# EAGLE board tarjeta-v9 (EAGLE 7.6.0)
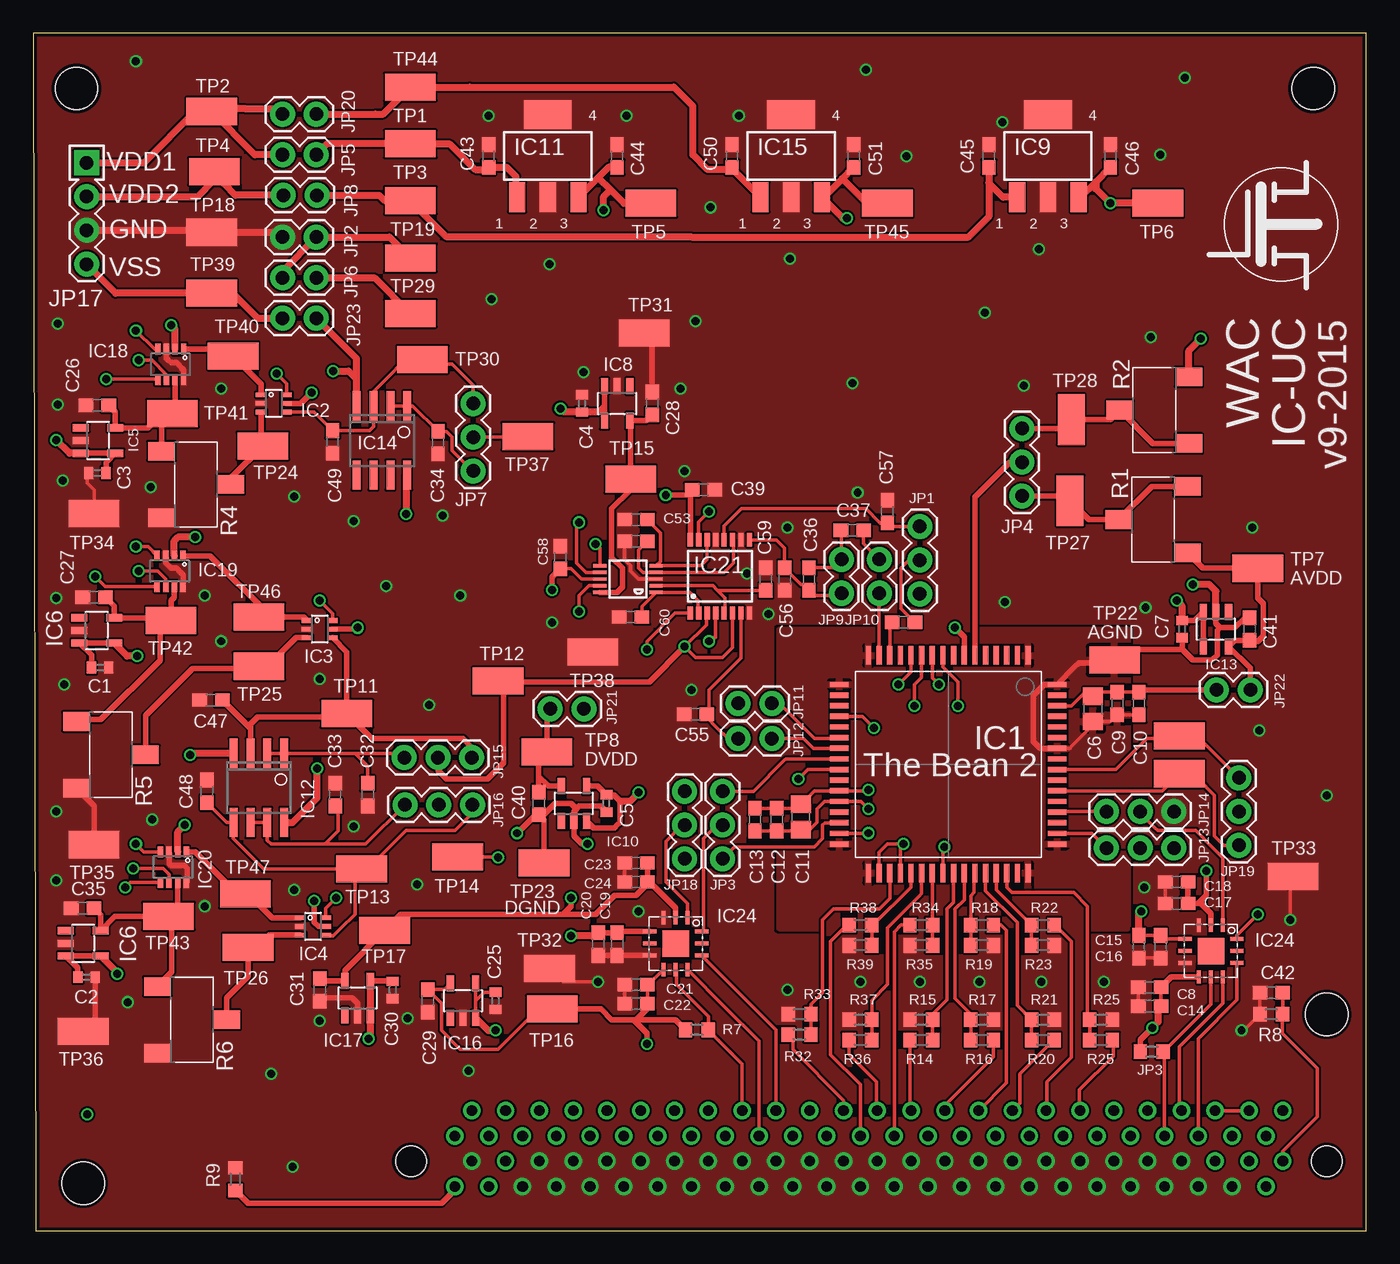
[diagram p0: board, top side]
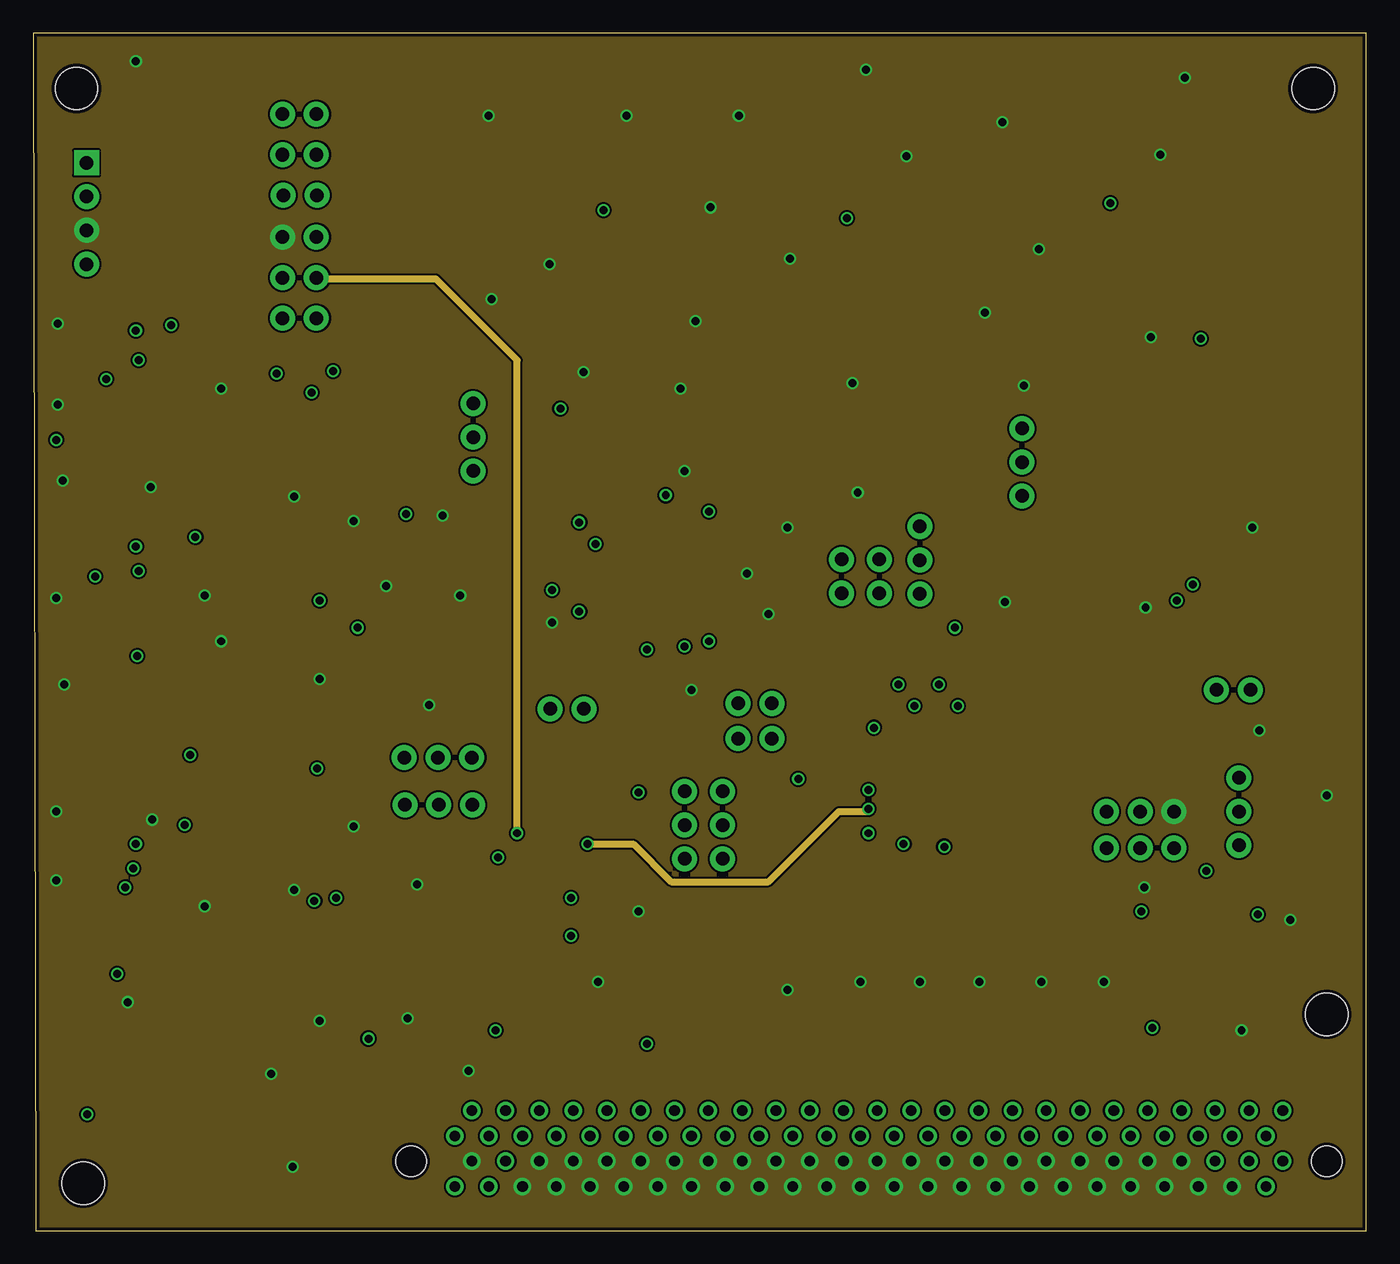
[diagram p1: board, inner layer Route2]
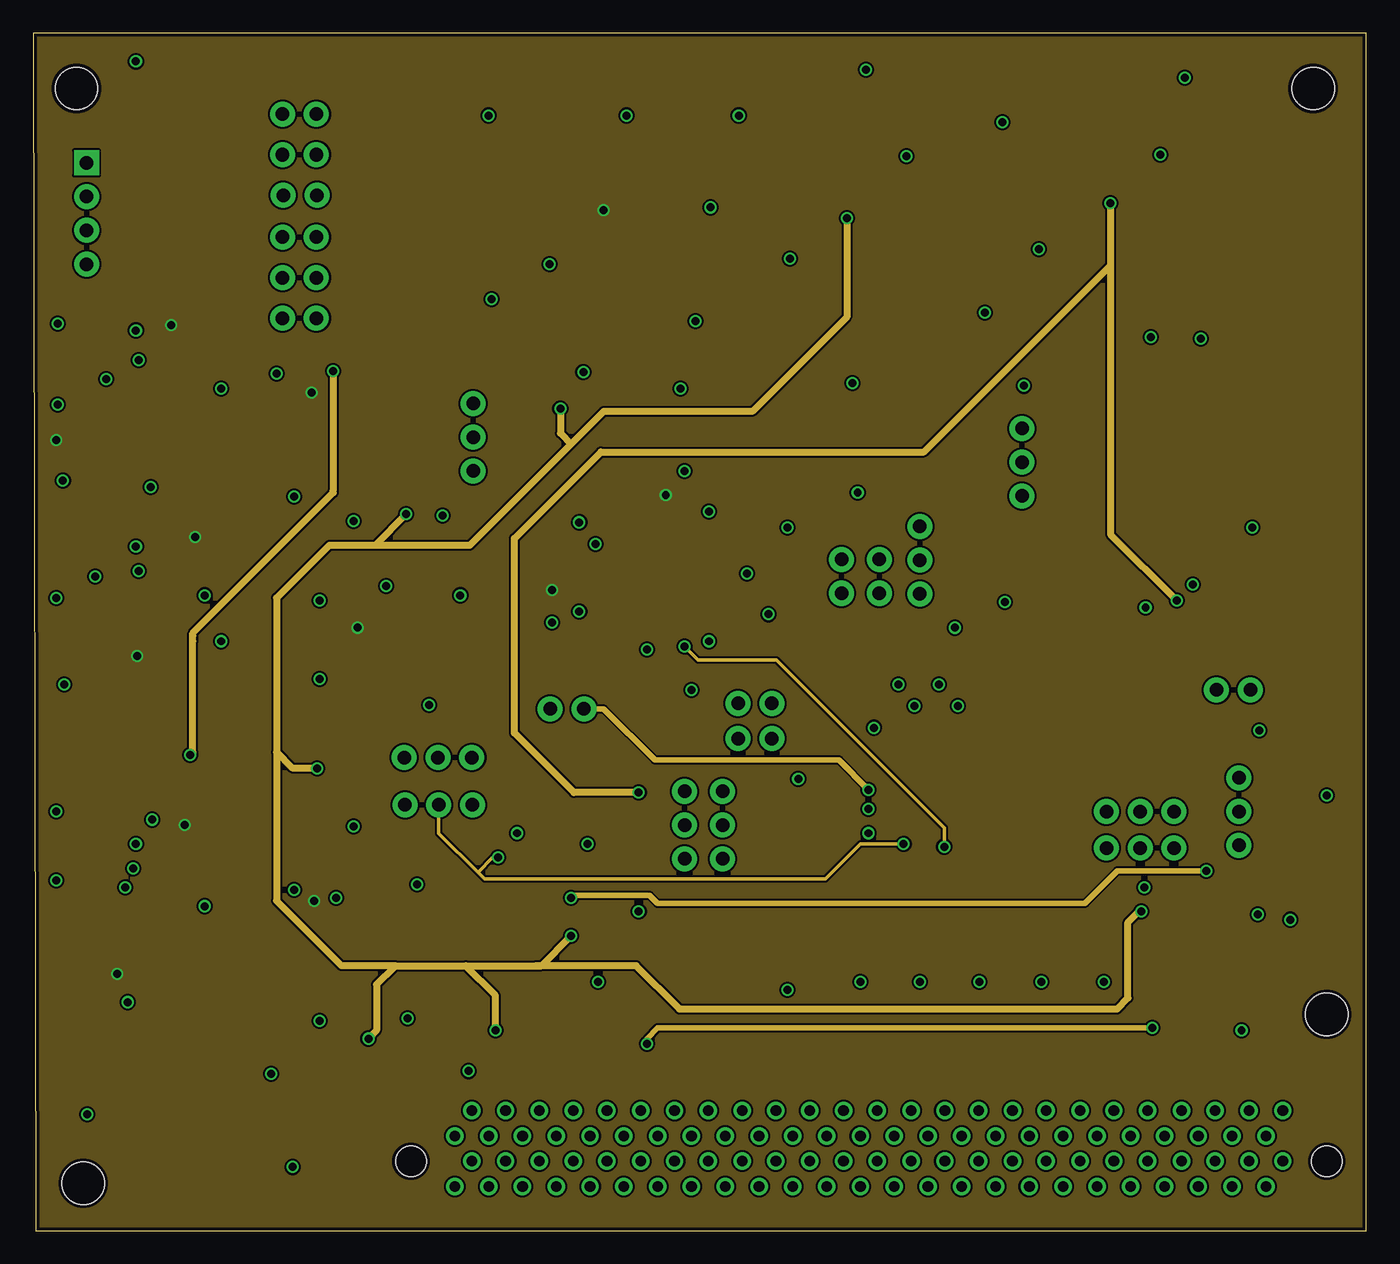
[diagram p2: board, inner layer Route3]
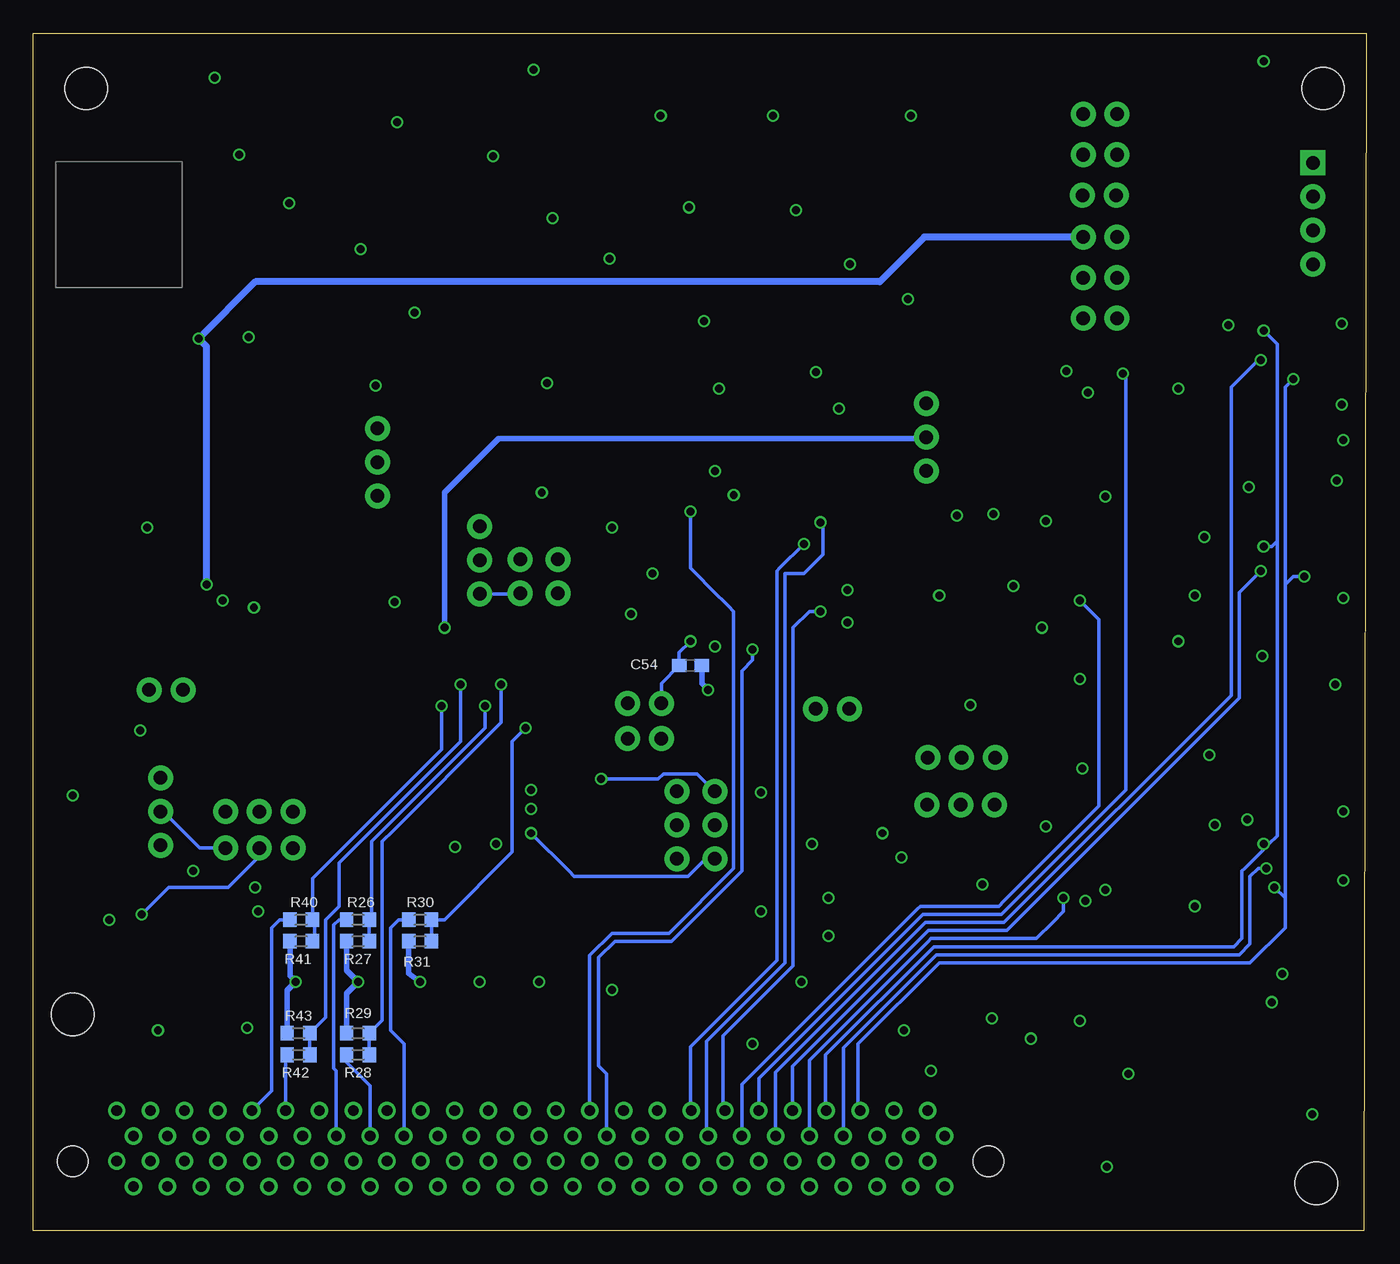
[diagram p3: board, bottom side, seen from below]

Size 100.2 x 90 mm. Coordinates in mm from the lower left corner, seen from the top.
Outline: 0.2,0 100.2,0 100.2,89.99 0,90 0.2,0
Copper layers [2:(1*2*3*16):3]: Top 0.035mm / dielectric 1.5mm / Route2 0.035mm / dielectric 0.15mm / Route3 0.035mm / dielectric 0.2mm / Bottom 0.035mm
Design rules "ITEADstudio_DRC": minimum track width 6mil, minimum drill 12mil, track to track 6mil, track to pad 6mil, pad to pad 6mil, via to via 6mil, smd to smd 0mil, copper to edge 10mil, drill to drill 10mil, minimum pad ring 10mil, minimum via ring 6mil, stop-mask expansion 2mil, vias tented up to drill 100mil, thermal gap 10mil
Holes 3.2 mm at 3.76,3.56 3.25,85.85 96.21,85.85 97.23,16.26

## Footprints (pad centres in the part's own frame; a part is rotated, then mirrored left to right if it is on the bottom)
C0402 = smd 0.7 x 0.9: 1 -0.65,0; 2 0.65,0
C0805 = smd 1.3 x 1.5: 1 -0.95,0; 2 0.95,0
C0603 = smd 1.1 x 1: 1 -0.85,0; 2 0.85,0
CQFP64 = smd 0.4 x 1.4: P$1 -6,-8.185; P$2 -5.2,-8.185; P$3 -4.4,-8.185; P$4 -3.6,-8.185; P$5 -2.8,-8.185; P$6 -2,-8.185; P$7 -1.2,-8.185; P$8 -0.4,-8.185; P$9 0.4,-8.185; P$10 1.2,-8.185; P$11 2,-8.185; P$12 2.8,-8.185; P$13 3.6,-8.185; P$14 4.4,-8.185; P$15 5.2,-8.185; P$16 6,-8.185; P$33 6,8.185; P$34 5.2,8.185; P$35 4.4,8.185; P$36 3.6,8.185; P$37 2.8,8.185; P$38 2,8.185; P$39 1.2,8.185; P$40 0.4,8.185; P$41 -0.4,8.185; P$42 -1.2,8.185; P$43 -2,8.185; P$44 -2.8,8.185; P$45 -3.6,8.185; P$46 -4.4,8.185; P$47 -5.2,8.185; P$48 -6,8.185 | smd 1.4 x 0.4: P$17 8.185,-6; P$18 8.185,-5.2; P$19 8.185,-4.4; P$20 8.185,-3.6; P$21 8.185,-2.8; P$22 8.185,-2; P$23 8.185,-1.2; P$24 8.185,-0.4; P$25 8.185,0.4; P$26 8.185,1.2; P$27 8.185,2; P$28 8.185,2.8; P$29 8.185,3.6; P$30 8.185,4.4; P$31 8.185,5.2; P$32 8.185,6; P$49 -8.185,6; P$50 -8.185,5.2; P$51 -8.185,4.4; P$52 -8.185,3.6; P$53 -8.185,2.8; P$54 -8.185,2; P$55 -8.185,1.2; P$56 -8.185,0.4; P$57 -8.185,-0.4; P$58 -8.185,-1.2; P$59 -8.185,-2; P$60 -8.185,-2.8; P$61 -8.185,-3.6; P$62 -8.185,-4.4; P$63 -8.185,-5.2; P$64 -8.185,-6
SC70 = smd 0.35 x 0.8: 1 -0.65,-0.95; 2 0,-0.95; 3 0.65,-0.95; 4 0.65,0.95; 5 0,0.95; 6 -0.65,0.95
SOT23-5L_2 = smd 0.55 x 1.2: 1 -0.95,-1.3; 2 0,-1.3; 3 0.95,-1.3; 4 0.95,1.3; 5 -0.95,1.3
SOT223 = smd 1.219 x 2.235: 1 -2.438,-3.099; 2 -0.127,-3.099; 3 2.184,-3.099 | smd 3.6 x 2.2: 4 -0.127,3.099
SOIC8 = smd 0.6 x 2.2: 1 -1.905,-2.6; 2 -0.635,-2.6; 3 0.635,-2.6; 4 1.905,-2.6; 5 1.905,2.6; 6 0.635,2.6; 7 -0.635,2.6; 8 -1.905,2.6
SOT23-8_2 = smd 0.406 x 0.813: 1 -1,-1.04; 2 -0.35,-1.04; 3 0.3,-1.04; 4 0.95,-1.04; 5 0.95,1.26; 6 0.3,1.26; 7 -0.35,1.26; 8 -1,1.26
QSOP16 = smd 0.4 x 1: 1 -2.223,-2.75; 2 -1.588,-2.75; 3 -0.953,-2.75; 4 -0.318,-2.75; 5 0.318,-2.75; 6 0.953,-2.75; 7 1.588,-2.75; 8 2.223,-2.75; 9 2.223,2.75; 10 1.588,2.75; 11 0.953,2.75; 12 0.318,2.75; 13 -0.318,2.75; 14 -0.953,2.75; 15 -1.588,2.75; 16 -2.223,2.75
TQFN12 = smd 1 x 0.3: P$1 0.05,-1.1; P$2 0.05,-2; P$3 0.05,-2.9; P$7 3.95,-2.9; P$8 3.95,-2; P$9 3.95,-1.1 | smd 0.3 x 1: P$4 1.1,-3.95; P$5 2,-3.95; P$6 2.9,-3.95; P$10 2.9,-0.05; P$11 2,-0.05; P$12 1.1,-0.05 | smd 2 x 2: P$13 2,-2
MSOP10 = smd 0.25 x 1: 1 -1,-2.113; 2 -0.5,-2.113; 3 0,-2.113; 4 0.5,-2.113; 5 1,-2.113; 6 1,2.113; 7 0.5,2.113; 8 0,2.113; 9 -0.5,2.113; 10 -1,2.113
FX2-100S-1.27 = drill 0.8: A1 0,0; A2 -1.27,-1.905; A3 -2.54,0; A4 -3.81,-1.905; A5 -5.08,0; A6 -6.35,-1.905; A7 -7.62,0; A8 -8.89,-1.905; A9 -10.16,0; A10 -11.43,-1.905; A11 -12.7,0; A12 -13.97,-1.905; A13 -15.24,0; A14 -16.51,-1.905; A15 -17.78,0; A16 -19.05,-1.905; A17 -20.32,0; A18 -21.59,-1.905; A19 -22.86,0; A20 -24.13,-1.905; A21 -25.4,0; A22 -26.67,-1.905; A23 -27.94,0; A24 -29.21,-1.905; A25 -30.48,0; A26 -31.75,-1.905; A27 -33.02,0; A28 -34.29,-1.905; A29 -35.56,0; A30 -36.83,-1.905; A31 -38.1,0; A32 -39.37,-1.905; A33 -40.64,0; A34 -41.91,-1.905; A35 -43.18,0; A36 -44.45,-1.905; A37 -45.72,0; A38 -46.99,-1.905; A39 -48.26,0; A40 -49.53,-1.905; A41 -50.8,0; A42 -52.07,-1.905; A43 -53.34,0; A44 -54.61,-1.905; A45 -55.88,0; A46 -57.15,-1.905; A47 -58.42,0; A48 -59.69,-1.905; A49 -60.96,0; A50 -62.23,-1.905; B1 0,3.8; B2 -1.27,1.895; B3 -2.54,3.8; B4 -3.81,1.895; B5 -5.08,3.8; B6 -6.35,1.895; B7 -7.62,3.8; B8 -8.89,1.895; B9 -10.16,3.8; B10 -11.43,1.895; B11 -12.7,3.8; B12 -13.97,1.895; B13 -15.24,3.8; B14 -16.51,1.895; B15 -17.78,3.8; B16 -19.05,1.895; B17 -20.32,3.8; B18 -21.59,1.895; B19 -22.86,3.8; B20 -24.13,1.895; B21 -25.4,3.8; B22 -26.67,1.895; B23 -27.94,3.8; B24 -29.21,1.895; B25 -30.48,3.8; B26 -31.75,1.895; B27 -33.02,3.8; B28 -34.29,1.895; B29 -35.56,3.8; B30 -36.83,1.895; B31 -38.1,3.8; B32 -39.37,1.895; B33 -40.64,3.8; B34 -41.91,1.895; B35 -43.18,3.8; B36 -44.45,1.895; B37 -45.72,3.8; B38 -46.99,1.895; B39 -48.26,3.8; B40 -49.53,1.895; B41 -50.8,3.8; B42 -52.07,1.895; B43 -53.34,3.8; B44 -54.61,1.895; B45 -55.88,3.8; B46 -57.15,1.895; B47 -58.42,3.8; B48 -59.69,1.895; B49 -60.96,3.8; B50 -62.23,1.895 | hole 2.3: -65.54,1.905; 3.31,1.905
1X03 = drill 1.016 pad 1.88: 1 -2.54,0; 2 0,0; 3 2.54,0
1X02 = drill 1.016 pad 1.88: 1 -1.27,0; 2 1.27,0
1X04 = drill 1.016 pad 1.88 square: 1 0,0 | drill 1.016 pad 1.88: 2 2.54,0; 3 5.08,0; 4 7.62,0
ST-5EW = smd 1.4 x 2: 1 -2.5,-2.6; 2 0,2.6; 3 2.5,-2.6
R0603 = smd 1 x 1.1: 1 -0.85,0; 2 0.85,0
TP = smd 3.81 x 2.032: TP 0,0

## Placement (x,y rotation side)
C1  [C0402]  5.03,42.32 0 top
C2  4.7uf  [C0402]  4.01,19.05 0 top
C3  [C0402]  4.82,56.95 180 top
C4  4.7uf  [C0402]  41.25,62.18 90 top
C5  [C0402]  43.08,32.11 270 top
C6  [C0805]  79.65,39.22 270 top
C7  [C0402]  86.36,45.21 270 top
C8  CAP_0603  [C0603]  83.92,18.29 180 top
C9  CAP_0603  [C0603]  81.48,39.62 270 top
C10  CAP_0603  [C0603]  83.11,39.62 270 top
C11  [C0805]  57.71,31.09 270 top
C12  CAP_0603  [C0603]  55.88,30.89 270 top
C13  CAP_0603  [C0603]  54.25,30.89 270 top
C14  CAP_0603  [C0603]  83.92,16.87 180 top
C15  CAP_0603  [C0603]  84.73,21.34 270 top
C16  CAP_0603  [C0603]  83.11,21.34 270 top
C17  CAP_0603  [C0603]  85.95,24.59 180 top
C18  CAP_0603  [C0603]  85.95,26.21 180 top
C19  CAP_0603  [C0603]  43.89,21.54 270 top
C20  CAP_0603  [C0603]  42.47,21.54 270 top
C21  CAP_0603  [C0603]  45.31,18.49 180 top
C22  CAP_0603  [C0603]  45.31,17.07 180 top
C23  CAP_0603  [C0603]  45.31,27.64 180 top
C24  CAP_0603  [C0603]  45.31,26.21 180 top
C25  [C0402]  34.74,17.27 270 top
C26  CAP_0603  [C0603]  4.82,62.03 180 top
C27  CAP_0603  [C0603]  4.57,47.6 180 top
C28  0.1uf  [C0603]  46.53,62.18 90 top
C29  0.1uf  [C0603]  29.66,17.27 270 top
C30  4.7uf  [C0402]  27.02,18.08 270 top
C31  0.1uf  [C0603]  21.54,18.08 270 top
C32  CAP_0603  [C0603]  25.14,32.77 270 top
C33  CAP_0603  [C0603]  22.7,32.77 90 top
C34  4.7uf  [C0603]  30.43,59.23 270 top
C35  0.1uf  [C0603]  3.71,24.23 180 top
C36  CAP_0603  [C0603]  58.32,48.97 90 top
C37  CAP_0603  [C0603]  61.57,52.63 0 top
C38  CAP_0603  [C0603]  65.43,45.72 180 top
C39  0.1uF  [C0603]  50.39,55.68 180 top
C40  CAP_0603  [C0603]  38,32.11 270 top
C41  CAP_0603  [C0603]  91.44,45.21 90 top
C42  1nf  [C0603]  93.06,17.88 180 top
C43  CAP_0603  [C0603]  34.24,80.77 90 top
C44  CAP_0603  [C0603]  43.89,80.77 90 top
C45  CAP_0603  [C0603]  71.83,80.77 90 top
C46  CAP_0603  [C0603]  80.97,80.77 90 top
C47  CAP_0603  [C0603]  13.36,39.88 180 top
C48  CAP_0603  [C0603]  13.05,33.02 90 top
C49  CAP_0603  [C0603]  22.5,59.28 270 top
C50  CAP_0603  [C0603]  52.52,80.77 90 top
C51  CAP_0603  [C0603]  61.67,80.77 90 top
C52  CAP_0603  [C0603]  45.31,51.82 180 top
C53  CAP_0603  [C0603]  45.31,53.44 180 top
C54  CAP_0603  [C0603]  50.8,42.47 0 bottom
C55  CAP_0603  [C0603]  49.78,38.81 180 top
C56  CAP_0603  [C0603]  56.49,48.97 270 top
C57  CAP_0603  [C0603]  64.21,54.05 90 top
C58  0.1uF  [C0603]  39.62,50.6 270 top
C59  CAP_0603  [C0603]  55.06,48.97 90 top
C60  CAP_0603  [C0603]  44.9,46.13 180 top
IC1  THEBEAN2  [CQFP64]  68.78,35.05 180 top
IC2  [SC70]  18.08,62.18 270 top
IC3  [SC70]  21.54,45.21 270 top
IC4  [SC70]  21.03,22.86 270 top
IC5  1.8V  [SOT23-5L_2]  4.87,59.39 270 top
IC6  1.8V  [SOT23-5L_2]  4.77,45.11 270 top
IC7  1.8V  [SOT23-5L_2]  3.76,21.59 270 top
IC8  1.8V  [SOT23-5L_2]  43.89,62.18 180 top
IC9  [SOT223]  76.4,80.77 0 top
IC10  1.8  [SOT23-5L_2]  40.64,32.11 0 top
IC11  [SOT223]  38.81,80.77 0 top
IC12  OP282  [SOIC8]  16.96,33.27 180 top
IC13  1.8  [SOT23-5L_2]  88.9,45.21 180 top
IC14  OP282  [SOIC8]  26.21,59.39 180 top
IC15  [SOT223]  57.1,80.77 0 top
IC16  1.8V  [SOT23-5L_2]  32.31,17.27 0 top
IC17  1.8V  [SOT23-5L_2]  24.38,17.48 0 top
IC18  AD5160_2  [SOT23-8_2]  10.31,65.23 180 top
IC19  AD5160_2  [SOT23-8_2]  10.26,49.68 180 top
IC20  AD5160_2  [SOT23-8_2]  10.51,27.43 180 top
IC21  [QSOP16]  51.61,49.17 0 top
IC22  [TQFN12]  90.52,23.01 270 top
IC23  DAC7554  [MSOP10]  44.7,48.97 90 top
IC24  [TQFN12]  50.29,23.57 270 top
J1  HIRESO_FX_CONNECTOR  [FX2-100S-1.27]  31.7,7.11 180 top
JP1  JUMPER03  [1X03]  66.65,50.39 270 top
JP2  JUMPER02  [1X02]  20.01,74.68 0 top
JP3  JUMPER03  [1X03]  51.81,30.48 90 top
JP4  JUMPER03  [1X03]  74.32,57.76 270 top
JP5  JUMPER02  [1X02]  20.01,80.87 180 top
JP6  JUMPER02  [1X02]  20.01,71.63 180 top
JP7  JUMPER03  [1X03]  33.07,59.64 90 top
JP8  JUMPER02  [1X02]  20.06,77.83 180 top
JP9  JUMPER02  [1X02]  60.75,49.17 90 top
JP10  JUMPER02  [1X02]  63.6,49.17 270 top
JP11  JUMPER02  [1X02]  54.25,39.62 0 top
JP12  JUMPER02  [1X02]  54.25,36.98 0 top
JP13  JUMPER03  [1X03]  83.21,28.75 180 top
JP14  JUMPER03  [1X03]  83.21,31.5 180 top
JP15  JUMPER03  [1X03]  30.43,35.56 0 top
JP16  JUMPER03  [1X03]  30.48,32 0 top
JP17  JUMPER04  [1X04]  4.01,80.26 270 top
JP18  JUMPER03  [1X03]  48.97,30.48 90 top
JP19  JUMPER03  [1X03]  90.62,31.5 270 top
JP20  JUMPER02  [1X02]  20.01,83.92 180 top
JP21  JUMPER02  [1X02]  40.13,39.22 0 top
JP22  JUMPER02  [1X02]  90.22,40.64 0 top
JP23  JUMPER02  [1X02]  20.01,68.58 180 top
R1  [ST-5EW]  84.17,53.44 90 top
R2  [ST-5EW]  84.27,61.67 90 top
R3  RES_0603  [R0603]  84.07,13.46 180 top
R4  [ST-5EW]  12.24,56.08 270 top
R5  [ST-5EW]  5.84,35.76 270 top
R6  [ST-5EW]  11.93,15.85 270 top
R7  RES_0603  [R0603]  49.88,15.09 180 top
R8  1M  [R0603]  93.06,16.26 0 top
R9  RES_0603  [R0603]  15.19,3.86 270 top
R14  RES_0603  [R0603]  66.75,14.33 180 top
R15  RES_0603  [R0603]  66.75,15.85 0 top
R16  RES_0603  [R0603]  71.32,14.33 0 top
R17  RES_0603  [R0603]  71.32,15.85 180 top
R18  RES_0603  [R0603]  71.32,22.96 0 top
R19  RES_0603  [R0603]  71.32,21.44 180 top
R20  RES_0603  [R0603]  75.89,14.33 0 top
R21  RES_0603  [R0603]  75.89,15.85 180 top
R22  RES_0603  [R0603]  75.89,22.96 0 top
R23  RES_0603  [R0603]  75.89,21.44 180 top
R24  RES_0603  [R0603]  80.26,14.33 0 top
R25  RES_0603  [R0603]  80.26,15.85 180 top
R26  RES_0603  [R0603]  75.79,23.37 180 bottom
R27  RES_0603  [R0603]  75.79,21.74 0 bottom
R28  RES_0603  [R0603]  75.79,13.21 180 bottom
R29  RES_0603  [R0603]  75.79,14.83 0 bottom
R30  RES_0603  [R0603]  71.12,23.37 180 bottom
R31  RES_0603  [R0603]  71.12,21.74 0 bottom
R32  RES_0603  [R0603]  57.6,14.73 180 top
R33  RES_0603  [R0603]  57.6,16.26 0 top
R34  0  [R0603]  66.75,22.96 180 top
R35  0  [R0603]  66.75,21.44 0 top
R36  RES_0603  [R0603]  62.18,14.33 180 top
R37  RES_0603  [R0603]  62.18,15.85 0 top
R38  RES_0603  [R0603]  62.18,22.96 180 top
R39  RES_0603  [R0603]  62.18,21.44 0 top
R40  RES_0603  [R0603]  80.06,23.37 180 bottom
R41  RES_0603  [R0603]  80.06,21.74 0 bottom
R42  RES_0603  [R0603]  80.26,13.21 180 bottom
R43  RES_0603  [R0603]  80.26,14.83 0 bottom
TP1  [TP]  28.34,81.69 0 top
TP2  [TP]  13.41,84.12 0 top
TP3  [TP]  28.34,77.42 0 top
TP4  [TP]  13.61,79.6 0 top
TP5  [TP]  46.43,77.22 0 top
TP6  [TP]  84.53,77.22 0 top
TP7  [TP]  92.05,49.78 0 top
TP8  [TP]  38.6,35.97 0 top
TP9  [TP]  86.15,34.34 0 top
TP10  [TP]  86.15,37.19 0 top
TP11  [TP]  23.57,38.86 0 top
TP12  [TP]  34.95,41.3 0 top
TP13  [TP]  24.69,27.18 0 top
TP14  [TP]  31.9,28.09 0 top
TP15  [TP]  44.9,56.49 0 top
TP16  [TP]  39.01,16.66 0 top
TP17  [TP]  26.41,22.56 0 top
TP18  [TP]  13.41,75.03 0 top
TP19  [TP]  28.34,73.1 0 top
TP22  [TP]  81.28,42.88 0 top
TP23  [TP]  38.4,27.64 0 top
TP24  [TP]  17.27,58.98 0 top
TP25  [TP]  16.96,42.42 0 top
TP26  [TP]  16.15,21.29 0 top
TP27  [TP]  77.92,54.86 270 top
TP28  [TP]  78.03,60.96 270 top
TP29  [TP]  28.34,68.94 0 top
TP30  [TP]  29.26,65.48 0 top
TP31  [TP]  45.92,67.46 0 top
TP32  [TP]  38.81,19.71 0 top
TP33  [TP]  94.69,26.62 0 top
TP34  [TP]  4.57,53.9 0 top
TP35  [TP]  4.57,29.01 0 top
TP36  [TP]  3.76,14.99 0 top
TP37  [TP]  37.18,59.69 0 top
TP38  [TP]  42.06,43.48 0 top
TP39  [TP]  13.41,70.46 0 top
TP40  [TP]  15.03,65.74 0 top
TP41  [TP]  10.46,61.42 0 top
TP42  [TP]  10.36,45.87 0 top
TP43  [TP]  10.16,23.62 0 top
TP44  [TP]  28.34,85.95 0 top
TP45  [TP]  64.21,77.22 0 top
TP46  [TP]  16.96,46.13 0 top
TP47  [TP]  15.95,25.3 0 top
U$1  LOGO  [LOGO]  98.5,70.87 90 top

## Library data of the parts
C1-C60 IC1-IC24 J1 JP1-JP23 R1-R9 R14-R43 TP1-TP19 TP22-TP47 U$1 = wac

## Nets
!CS_ADC1: IC22.P$9 J1.A44
!CS_ADC2: IC24.P$9 J1.A19
!CS_DAC: IC23.9 J1.A14
ADC1_IN+: IC22.P$12 JP13.2
ADC1_IN-: IC22.P$1 JP14.2
ADC2_IN+: IC24.P$12 JP3.2
ADC2_IN-: IC24.P$1 JP18.2
AGND: C6.2 C7.2 C9.2 C10.2 C41.2 IC1.P$1 IC1.P$16 IC1.P$17 IC1.P$32 IC1.P$33 IC1.P$48 IC1.P$49 IC1.P$58 IC1.P$64 IC13.2 JP2.2 JP6.2 R2.3 TP19.TP TP22.TP
AVDD: C41.1 IC13.5 JP22.2 R1.1 TP7.TP
AVDD_BEAN: C6.1 C9.1 C10.1 IC1.P$62 JP22.1
BASELINE: IC1.P$56 JP19.1 TP10.TP
CAP_PRECHAR: C38.2 IC1.P$14
CAP_PRECHAR_1: C57.1 IC21.12 JP1.1
CLK: IC1.P$20 R30.1 R31.2
CLK_ADC1: IC22.P$10 J1.A45
CLK_ADC2: IC24.P$10 J1.A20
CLK_DAC: IC23.6 J1.A16
CLK_PRECH1: IC1.P$9 R40.1 R41.2
CLK_PRECH1_T: J1.A42 R40.2
CLK_PRECH2: IC1.P$10 R42.1 R43.2
CLK_PRECH2_T: J1.A40 R42.2
CLK_REF: IC18.4 IC19.4 IC20.4 J1.A8
CLK_T: J1.A33 R30.2
CS_B0: IC1.P$41 R14.1 R15.2
CS_B0_T: J1.A28 R14.2
CS_B1: IC1.P$42 R16.1 R17.2
CS_B1_T: J1.A30 R16.2
CS_B2: IC1.P$43 R18.1 R19.2
CS_B2_T: J1.A32 R18.2
CS_B3: IC1.P$44 R20.1 R21.2
CS_B3_T: J1.A34 R20.2
CS_B4: IC1.P$45 R22.1 R23.2
CS_B4_T: J1.A36 R22.2
CS_B5: IC1.P$46 R24.1 R25.2
CS_B5_T: J1.A38 R24.2
CS_REF_1: IC18.6 J1.A11
CS_REF_2: IC19.6 J1.A10
CS_REF_3: IC20.6 J1.A7
DGND: C5.2 C11.2 C12.2 C13.2 C40.2 IC1.P$28 IC10.2 JP6.1 TP23.TP TP29.TP
DIGIPOT1: IC2.1 IC18.1 TP40.TP
DIGIPOT2: IC3.1 IC19.1 TP46.TP
DIGIPOT3: IC4.1 IC20.1 TP47.TP
DVDD: C40.1 IC10.5 JP21.1 TP8.TP
DVDD_BEAN: C11.1 C12.1 C13.1 IC1.P$27 JP21.2
GND: C1.2 C2.2 C3.2 C4.2 C8.2 C14.2 C15.2 C16.2 C17.2 C18.2 C19.2 C20.2 C21.2 C22.2 C23.2 C24.2 C25.2 C26.2 C27.2 C28.2 C29.2 C30.2 C31.2 C32.2 C33.2 C34.2 C35.2 C39.1 C42.2 C43.2 C44.2 C45.2 C46.2 C47.2 C48.2 C49.2 C50.2 C51.2 C52.2 C53.2 C54.2 C55.2 C56.2 C57.2 C58.1 C59.2 C60.2 IC2.2 IC3.2 IC4.2 IC5.2 IC6.2 IC7.2 IC8.2 IC9.2 IC9.4 IC11.2 IC11.4 IC15.2 IC15.4 IC16.2 IC17.2 IC18.3 IC18.8 IC19.3 IC19.8 IC20.3 IC20.8 IC21.8 IC21.10 IC21.13 IC22.P$3 IC22.P$6 IC23.3 IC24.P$3 IC24.P$6 J1.B2 J1.B5 J1.B6 J1.B7 J1.B8 J1.B9 J1.B10 J1.B11 J1.B12 J1.B13 J1.B14 J1.B15 J1.B16 J1.B17 J1.B18 J1.B19 J1.B20 J1.B21 J1.B22 J1.B23 J1.B24 J1.B25 J1.B26 J1.B27 J1.B28 J1.B29 J1.B30 J1.B31 J1.B32 J1.B33 J1.B34 J1.B35 J1.B36 J1.B37 J1.B38 J1.B39 J1.B40 J1.B41 J1.B42 J1.B43 J1.B44 J1.B45 J1.B47 JP2.1 JP14.1 JP17.3 R4.3 R5.3 R6.3 R8.1 R9.1 R15.1 R17.1 R19.1 R21.1 R23.1 R25.1 R27.1 R29.1 R31.1 R33.1 R35.1 R37.1 R39.1 R41.1 R43.1 TP18.TP TP31.TP TP32.TP TP33.TP TP34.TP TP35.TP TP36.TP TP38.TP
HOLD: IC1.P$37 R38.1 R39.2
HOLD_T: J1.A25 R38.2
MUX_DAC_EN: IC21.15 J1.A22
MUX_DAC_SEL: IC21.1 J1.A21
MUX_REF_1: IC2.6 J1.A12
MUX_REF_2: IC3.6 J1.A13
MUX_REF_3: IC4.6 J1.A9
N$1: C36.2 C37.1 JP9.2
N$2: J1.B1 R9.2
N$3: C37.2 JP10.1
N$4: J1.A46 J1.A48
N$6: C38.1 JP1.2
N$9: JP13.1 JP19.2
N$10: C42.1 J1.B50 R8.2
OP_MODE: IC1.P$11 R26.1 R27.2
OP_MODE_T: J1.A37 R26.2
OUT_S: IC1.P$35 R32.1 R33.2
OUT_S_T: J1.A24 R32.2
POT_R1: JP4.3 R1.2 R1.3 TP27.TP
POT_R2: JP4.1 R2.1 R2.2 TP28.TP
POT_R4: IC2.3 R4.2 TP24.TP
POT_R5: IC3.3 R5.2 TP25.TP
POT_R6: IC4.3 R6.2 TP26.TP
REF_ADC: C17.1 C18.1 C23.1 C24.1 C31.1 IC17.5 IC22.P$2 IC24.P$2 TP17.TP
REFIN_DAC: C28.1 IC8.5 IC23.10 TP15.TP
RES_BIAS_EXT: IC1.P$6 JP4.2
RST: IC1.P$38 R36.1 R37.2
RST_CSA: IC1.P$12 R28.1 R29.2
RST_CSA_T: J1.A35 R28.2
RST_T: J1.A26 R36.2
SDI_DAC: IC23.7 J1.A15
SDI_REF: IC18.5 IC19.5 IC20.5 J1.A6
SDO_ADC1: IC22.P$8 J1.A43 R3.1
SDO_ADC2: IC24.P$8 J1.A18 R7.1
SGN: IC1.P$39 R34.1 R35.2
SGN_T: J1.A27 R34.2
V0NDAC: C59.1 IC21.5 IC23.2
V0PDAC: C60.1 IC21.2 IC23.1
V1NDAC: C53.1 IC21.14 IC23.5
V1PDAC: C52.1 IC21.11 IC23.4
V_REF_PRECHAR: IC1.P$7 JP7.2 TP37.TP
V_REF_PRECHAR_BUFF: C34.1 IC14.1 IC14.2 JP7.1
VDD: C1.1 C2.1 C3.1 C39.2 C44.1 C58.2 IC2.5 IC3.5 IC4.5 IC5.3 IC5.4 IC6.3 IC6.4 IC7.3 IC7.4 IC11.3 IC18.2 IC19.2 IC20.2 IC21.16 IC23.8 TP5.TP
VDD2: C5.1 C7.1 C46.1 IC9.3 IC10.3 IC10.4 IC13.3 IC13.4 TP6.TP
VDD3: C4.1 C15.1 C16.1 C19.1 C20.1 C25.1 C30.1 C51.1 IC8.3 IC8.4 IC12.8 IC14.8 IC15.3 IC16.3 IC16.4 IC17.3 IC17.4 IC22.P$4 IC24.P$4 TP45.TP
VDD_REF_1: C26.1 IC5.5 IC18.7 R4.1 TP41.TP
VDD_REF_2: C27.1 IC6.5 IC19.7 R5.1 TP42.TP
VDD_REF_3: C35.1 IC7.5 IC20.7 R6.1 TP43.TP
VDD_SUPPLY_1: C43.1 IC11.1 JP5.1 TP1.TP
VDD_SUPPLY_2: C45.1 IC9.1 JP8.1 TP3.TP
VDD_SUPPLY_3: C50.1 IC15.1 JP20.1 TP44.TP
VDD_SUPPLY_IN_1: JP5.2 JP17.1 JP20.2 TP2.TP
VDD_SUPPLY_IN_2: JP8.2 JP17.2 TP4.TP
VI+_FIL: IC1.P$22 JP11.2
VI+_FIL_DAC: C54.1 IC21.4 JP11.1
VI-_FIL: IC1.P$23 JP12.2
VI-_FIL_DAC: C55.1 IC21.7 JP12.1
VICM: IC1.P$40 IC21.3 IC21.6 JP15.2 TP12.TP
VICM_BUFF: C32.1 IC12.1 IC12.2 JP15.1
VICM_MUX: C47.1 IC3.4 IC12.3 JP15.3 TP11.TP
VIN_CSA: IC1.P$15 JP1.3 JP10.2
VIN_CSA_1: C36.1 C56.1 IC21.9 JP9.1
VL_ADC: C8.1 C14.1 C21.1 C22.1 C29.1 IC16.5 IC22.P$7 IC24.P$7 R3.2 R7.2 TP16.TP
VO+_BP_FIL: IC1.P$24 JP3.3
VO+_CH: IC1.P$50 JP13.3
VO+_FIL: IC1.P$30 JP3.1
VO-_BP_FIL: IC1.P$25 JP18.3
VO-_CH: IC1.P$52 JP14.3
VO-_FIL: IC1.P$31 JP18.1
VOCM: IC1.P$34 IC1.P$36 JP16.2 TP14.TP
VOCM_1: C49.1 IC2.4 IC14.3 JP7.3 TP30.TP
VOCM_BUFF: C33.1 IC12.6 IC12.7 JP16.1
VOCM_MUX: C48.1 IC4.4 IC12.5 JP16.3 TP13.TP
VOUT_CSA: IC1.P$54 JP19.3 TP9.TP
VSS: IC12.4 IC14.4 JP23.1
VSS_IN: JP17.4 JP23.2 TP39.TP

## Tracks (layer width: path | path; a pad name or v marks a point on that pad's centre or on a via)
!CS_ADC1
  Top 0.254: IC22.P$9 89.42,17.09 86.15,13.82 86.15,9.17 J1.A44
!CS_ADC2
  Top 0.254: IC24.P$9 52.02,16.79 54.56,14.25 J1.A19
!CS_DAC  (via drill 0.6)
  Top 0.254: IC23.9 41.76,48.47 41.04,47.75 v41.04,46.53
  Bottom 0.254: v41.04,46.53 41.86,46.53 43.08,45.31 43.08,19.91 48.36,14.63 48.36,9.17 J1.A14
ADC1_IN+  (via drill 0.6)
  Top 0.254: IC22.P$12 90.47,22.2 v92.05,23.77
  Bottom 0.254: JP13.2 83.31,28.65 83.31,28.04 85.54,25.81 90.01,25.81 v92.05,23.77
ADC1_IN-
  Top 0.254: JP14.2 83.21,31.39 84.33,30.28 84.53,30.07 87.37,30.07 88.59,28.85 89.2,28.25 89.42,28.02 IC22.P$1
ADC2_IN+
  Top 0.254: JP3.2 51.41,30.48 50.39,29.46 50.39,22.62 IC24.P$12
ADC2_IN-
  Top 0.254: JP18.2 48.77,30.48 47.55,29.26 47.55,26.21 49.17,24.59 49.17,23.54 IC24.P$1
AGND  (via drill 0.6)
  Top 0.254: C10.2 C9.2 80.97,38.27 C6.2 79.65,38 78.03,36.37 77.91,36.25 IC1.P$58
  Top 0.406: C41.2 91.27,46.06 91.07,46.06 90.32,45.31 89.2,45.31 | IC13.2 88.9,45.62 89.2,45.31 | C7.2 86.36,43.69 | 86.36,43.69 87.17,42.88 88.59,42.88 89,43.28 89,45.11 89.2,45.31 | 86.36,43.69 84.53,43.69 82.09,43.69 TP22.TP 81.07,42.67 78.59,42.67 | 83.14,38.81 C10.2 | 78.59,42.67 78.31,42.39 | 78.31,42.39 IC1.P$64 75.99,41.05 75.18,40.23 75.18,36.78 75.71,36.25 IC1.P$58 | 78.59,42.67 78.31,42.39
  Top 0.508: JP6.2 18.74,72.14 JP2.2 26.77,74.68 TP19.TP | R2.3 86.87,66.15 v87.78,67.06 | IC13.2 88.9,48.06 88.39,48.56 v87.17,48.56
  Bottom 0.508: v87.17,48.56 87.17,66.45 v87.78,67.06 83.51,71.32 36.57,71.32 33.22,74.68 JP2.2
  pour Top: 56.08,44.3 56.08,22.76 81.89,22.76 82.29,22.76 82.29,45.11 56.08,45.11
AVDD
  Top 0.406: JP22.2 91.49,42.27 IC13.5 90.3,44.36 C41.1 91.5,44.3 92.05,44.3 92.45,44.7 92.45,47.14 92.05,47.55 TP7.TP 87.93,49.78 R1.1
AVDD_BEAN
  Top 0.254: C6.1 79.96,40.47 C9.1 C10.1 79.08,40.47 78.03,39.42 77,39.42 IC1.P$62
  Top 0.406: JP22.1 83.27,40.64 C10.1
BASELINE
  Top 0.254: IC1.P$56 81.39,34.65 83.72,36.98 85.95,36.98 TP10.TP 87.47,37.19 JP19.1
CAP_PRECHAR
  Top 0.254: IC1.P$14 64.38,45.52 C38.2
CAP_PRECHAR_1
  Top 0.254: JP1.1 64.48,52.93 C57.1 63.64,53.2 62.58,54.25 53.23,54.25 51.93,52.95 IC21.12
CLK  (via drill 0.6)
  Top 0.254: IC1.P$20 62.34,38.65 v63.19,37.8
  Bottom 0.254: R31.2 R30.1 69.29,23.37 64.21,28.45 64.21,36.78 v63.19,37.8
CLK_ADC1
  Top 0.254: IC22.P$10 90.47,17.32 87.58,14.43 J1.A45
CLK_ADC2
  Top 0.254: IC24.P$10 53.29,17.62 55.83,15.08 J1.A20
CLK_DAC  (via drill 0.6)
  Top 0.254: IC23.6 42.59,51.29 v42.26,51.61
  Bottom 0.254: v42.26,51.61 44.09,49.78 44.29,49.58 44.29,20.32 50.8,13.82 50.8,9.07 J1.A16
CLK_PRECH1  (via drill 0.6)
  Top 0.254: IC1.P$9 68.38,42.36 69.49,41.25 v69.49,39.42
  Bottom 0.254: R41.2 79.04,21.91 79.04,23.37 R40.1 79.21,26.45 78.94,26.72 69.49,36.17 v69.49,39.42
CLK_PRECH1_T
  Bottom 0.254: R40.2 81.68,23.37 82.29,22.76 82.29,10.49 J1.A42
CLK_PRECH2  (via drill 0.6)
  Top 0.254: IC1.P$10 67.58,41.53 v68.07,41.05
  Bottom 0.254: R42.1 R43.2 78.23,16.02 78.23,23.37 77.82,23.77 77.21,24.38 77.21,27.64 76.5,28.35 68.07,36.78 v68.07,41.05
CLK_PRECH2_T
  Bottom 0.254: J1.A40 81.23,13.09 R42.2
CLK_REF  (via drill 0.6)
  Top 0.254: IC20.4 8.3,28.47 v7.72,29.06 | v7.72,51.41 8.62,51.41 IC19.4 | IC18.4 9.12,66.27 v7.72,67.67
  Bottom 0.254: J1.A8 40.64,9.07 40.64,13.21 32.51,21.34 9.95,21.34 9.34,21.95 9.34,27.03 9.14,27.23 7.72,28.65 v7.72,29.06 7.31,29.06 6.7,29.67 6.7,51.82 | 6.7,51.82 6.7,66.24 6.7,66.65 v7.72,67.67 | v7.72,51.41 7.11,51.41 6.7,51.82
CLK_T
  Bottom 0.254: R30.2 72.74,23.37 73.35,22.76 73.35,15.04 72.34,14.02 J1.A33
CS_B0
  Top 0.254: IC1.P$41 69.18,24.68 68.88,24.38 68.68,24.18 68.68,17.34 67.6,16.26 R15.2 R14.1
CS_B0_T
  Top 0.254: 65.9,9.11 J1.A28 65.9,9.11 | R14.2 65.9,9.11
CS_B1
  Top 0.254: IC1.P$42 69.98,24.87 69.29,24.18 69.29,17.44 70.47,16.26 R17.2 R16.1
CS_B1_T
  Top 0.254: R16.2 72.17,13.04 70.91,11.79 68.53,9.4 J1.A30
CS_B2
  Top 0.254: IC1.P$43 70.71,26.8 70.71,25.4 70.47,25.16 R18.1 R19.2
CS_B2_T
  Top 0.254: R18.2 72.74,22.96 73.15,22.55 73.15,11.1 J1.A32
CS_B3
  Top 0.254: 73.96,22.35 73.96,21.95 | 73.96,21.95 73.96,17.34 73.96,16.93 R21.2 R20.1 | IC1.P$44 71.58,25.55 73.96,23.16 73.96,21.95
CS_B3_T
  Top 0.254: R20.2 76.7,14.33 74.17,11.79 74.17,9.58 J1.A34
CS_B4
  Top 0.254: IC1.P$45 72.38,25.62 R22.1 | R22.1 75.04,22.82 74.98,22.76 | R23.2 R22.1
CS_B4_T
  Top 0.254: J1.A36 76.2,9.07 76.2,11.18 78.03,13.01 78.03,21.74 77.42,22.35 76.81,22.96 R22.2
CS_B5
  Top 0.254: IC1.P$46 73.18,25.77 73.56,25.4 78.23,25.4 79.25,24.38 79.25,16.02 R25.2 R24.1
CS_B5_T
  Top 0.254: J1.A38 78.64,9.07 78.64,10.57 81.17,13.11 81.17,14.33 R24.2
CS_REF_1  (via drill 0.6)
  Top 0.254: IC18.6 10.01,64.36 8.94,65.43 v7.92,65.43
  Bottom 0.254: J1.A11 44.4,11.89 33.12,23.16 27.23,23.16 10.16,40.23 10.16,63.4 8.12,65.43 v7.92,65.43
CS_REF_2  (via drill 0.6)
  Top 0.254: IC19.6 9.96,48.97 9.34,49.58 v7.92,49.58
  Bottom 0.254: J1.A10 43.13,12.34 32.92,22.55 27.02,22.55 9.55,40.03 9.55,47.95 v7.92,49.58
CS_REF_3  (via drill 0.6)
  Top 0.254: IC20.6 10.21,26.77 9.75,27.23 v7.52,27.23
  Bottom 0.254: J1.A7 39.32,13.72 32.31,20.73 9.55,20.73 8.73,21.54 8.73,26.62 8.12,27.23 v7.52,27.23
DGND  (via drill 0.6)
  Top 0.254: C13.2 C12.2 57.6,30.04 C11.2 57.77,30.07 58.32,30.07 58.93,30.68 58.93,31.7 59.48,32.25 IC1.P$28 62.23,32.25 v62.79,31.7
  Top 0.406: 40.84,31.7 40.64,31.5 IC10.2 40.64,29.67 41.25,29.06 v41.65,29.06 | 40.84,31.7 41.04,31.9 42.63,31.9 C5.2 | C40.2 38.36,31.26 39.21,32.11 40.43,32.11 40.84,31.7 | TP23.TP 38.4,30.85 C40.2 | C40.2 37.76,31.26 v36.37,29.87
  Top 0.508: JP6.1 25.65,71.63 TP29.TP
  Route2 0.406: 62.58,31.5 v62.79,31.7
  Route2 0.508: v41.65,29.06 45.11,29.06 47.95,26.21 55.27,26.21 60.55,31.5 62.58,31.5 | v36.37,29.87 36.37,65.43 30.27,71.53 21.38,71.53 JP6.1
DIGIPOT1
  Top 0.406: IC18.1 14.5,66.27 TP40.TP 17.13,63.64 IC2.1
DIGIPOT2
  Top 0.406: IC19.1 13.28,50.72 14.02,49.99 16.96,47.04 TP46.TP 20.32,46.13 IC3.1
DIGIPOT3
  Top 0.406: IC20.1 11.54,28.45 12.19,28.45 15.34,25.3 TP47.TP 16.25,24.99 16.46,24.99 17.94,23.51 IC4.1
DVDD
  Top 0.406: C40.1 38,34.14 | 38,34.14 38,35.36 TP8.TP 38.61,38.96 JP21.1 | IC10.5 38.73,33.41 38,34.14
DVDD_BEAN  (via drill 0.6)
  Top 0.254: C13.1 C12.1 57.4,31.74 C11.1 58.72,33.05 IC1.P$27 62.72,33.05 v62.79,33.12
  Route3 0.406: JP21.2 42.87,39.22 46.73,35.36 60.55,35.36 v62.79,33.12
GND  (via drill 0.6)
  Top 0.254: TP34.TP 4.57,55.68 4.06,56.19 4.06,56.84 C3.2 | C16.2 C15.2 | C18.2 C17.2 | C14.2 C8.2 | v94.48,23.37 94.48,26.42 TP33.TP | C42.2 R8.1 90.99,15.04 v90.83,15.04 | C23.2 C24.2 | C22.2 C21.2 | 43.85,46.33 C60.2 | C52.2 44.46,50.43 44.9,49.99 44.9,49.58 45.51,48.97 45.92,48.97 IC23.3 | v42.47,18.69 41.25,18.69 39.82,18.69 TP32.TP
  Top 0.406: IC19.3 9.96,50.19 10.36,49.78 10.77,49.78 11.07,49.48 | 11.07,49.48 11.17,49.38 | IC19.8 11.26,49.29 11.07,49.48 | C2.2 4.66,15.89 TP36.TP | IC20.3 10.21,27.58 10.36,27.43 11.38,27.43 11.58,27.23 11.58,26.24 IC20.8 | IC17.2 24.38,17.07 23.97,17.48 21.78,17.48 C31.2 | C28.2 46.53,66.45 46.53,66.85 TP31.TP | TP35.TP 4.57,31.93 R5.3 | IC24.P$6 43.91,20.67 C19.2 C20.2 | IC18.3 10.01,65.58 10.16,65.43 10.36,65.23 10.77,65.23 11.17,64.82 11.31,64.68 IC18.8
  Top 0.508: JP17.3 13.15,75.18 TP18.TP 18.39,75.03 JP2.1
  Bottom 0.406: C54.2 49.95,41.11 v49.48,40.64 | R31.1 71.97,19.34 v71.12,18.69 | R27.1 76.64,19.54 v75.79,18.69 76.64,17.84 R29.1 | R41.1 80.91,19.14 v80.46,18.69 81.11,18.05 R43.1
  other vias: 56.69,18.08 62.18,18.69 66.65,18.69 83.51,25.81 28.85,26.01 48.97,57.1 55.27,46.33 56.69,52.83 61.97,55.47 53.64,49.38 39.01,45.72 7.11,17.17 1.72,26.31 12.9,24.38 19.61,25.6 21.54,15.75 28.14,15.95 1.72,31.5 8.94,30.89 2.33,41.05 12.9,47.75 21.54,41.45 24.08,30.38 8.84,55.88 2.23,56.39 14.12,63.3 41.35,64.52 34.24,83.82 72.84,83.31 53.03,83.82 38.81,72.64 84.73,80.87 65.63,80.77 92.15,37.59 83.61,46.84 91.64,52.83 45.51,23.98 73.05,47.24 74.47,63.5 84.02,67.16 48.66,63.3 44.6,83.82 50.9,76.91 75.59,73.76 56.89,73.05 49.78,68.38 61.57,63.7 86.56,86.66 7.72,87.88 62.58,87.27 1.83,62.08 1.83,68.17 19.61,55.17 30.78,53.75 24.08,53.34 14.12,44.3 1.72,47.55 26.51,48.46 29.77,39.52 17.88,11.79 32.71,11.99 71.52,68.99 19.5,4.78 32.1,47.75 34.44,70 97.23,32.72
  pour Route2 (no thermals): 0.2,89.92 100.28,89.92 100.28,0 0.2,0
  pour Top (rank 2, no thermals): 0.2,89.92 100.28,89.92 100.28,0 0.2,0
HOLD
  Top 0.254: IC1.P$37 65.98,25.81 63.14,22.96 R38.1 R39.2
HOLD_T
  Top 0.254: J1.A25 62.18,10.97 59.94,13.21 59.94,21.74 61.16,22.96 R38.2
MUX_DAC_EN  (via drill 0.6)
  Top 0.254: IC21.15 50.02,53.28 v50.8,54.05
  Bottom 0.254: v50.8,54.05 50.8,49.78 48.77,47.75 48.36,47.35 47.95,46.94 47.55,46.53 47.55,27.23 52.42,22.35 56.69,22.35 58.37,20.68 J1.A22
MUX_DAC_SEL  (via drill 0.6)
  Top 0.254: IC21.1 49.37,46.41 48.24,46.41 46.12,44.3 v46.12,43.69
  Bottom 0.254: v46.12,43.69 46.12,42.88 46.94,42.06 46.94,27.03 52.22,21.74 56.49,21.74 57.71,20.52 57.71,12.39 57.1,11.79 J1.A21
MUX_REF_1  (via drill 0.6)
  Top 0.254: IC2.6 19.03,63.67 v18.29,64.41
  Bottom 0.254: J1.A12 45.67,11.43 33.32,23.77 27.43,23.77 18.08,33.12 18.08,64.21 v18.29,64.41
MUX_REF_2  (via drill 0.6)
  Top 0.254: IC3.6 22.49,46.4 v21.54,47.35
  Bottom 0.254: J1.A13 46.94,10.97 33.73,24.18 33.53,24.38 27.84,24.38 27.63,24.38 27.23,24.79 20.11,31.9 20.11,45.92 v21.54,47.35
MUX_REF_3  (via drill 0.6)
  Top 0.254: IC4.6 21.98,24.22 v22.75,24.99
  Bottom 0.254: J1.A9 41.86,12.8 32.92,21.74 32.71,21.95 24.79,21.95 23.57,23.16 22.75,23.98 v22.75,24.99
N$1
  Top 0.254: 60.7,50.39 JP9.2 | JP9.2 60.75,52.59 C37.1 | C36.2 60.13,49.82 JP9.2
N$2
  Top 0.406: J1.B1 31.7,3.05 30.68,2.03 16.16,2.03 R9.2
N$3
  Top 0.254: C37.2 62.42,51.63 JP10.1
N$4
  Top 0.254: J1.A46 J1.A48
N$5  (via drill 0.6)
  other vias: 4.06,8.74
N$6
  Top 0.254: JP1.2 65.83,50.39 65.22,49.78 65.22,46.77 C38.1
N$9
  Bottom 0.254: JP13.1 87.68,28.75 90.22,31.29 90.42,31.29 JP19.2
N$10
  Top 0.254: C42.1 R8.2 93.88,16.22 93.88,14.83 96.52,12.19 96.52,8.53 93.93,5.94 J1.B50
OP_MODE  (via drill 0.6)
  Top 0.254: IC1.P$11 66.78,41.59 66.24,41.05 v66.24,39.42
  Bottom 0.254: R27.2 R26.1 74.77,23.53 74.77,29.26 66.24,37.8 v66.24,39.42
OP_MODE_T
  Bottom 0.254: J1.A37 77.42,11.99 77.52,12.09 77.62,12.19 77.62,22.96 77.21,23.37 R26.2
OUT_S
  Top 0.254: 64,24.59 63.6,24.18 61.16,24.18 60.14,24.18 59.33,23.37 59.33,22.35 59.33,17.88 58.45,17 R33.2 R32.1 | 64,24.59 64.21,24.79 | IC1.P$35 64.38,24.96 64,24.59
OUT_S_T
  Top 0.254: J1.A24 60.91,9.8 57.1,13.61 57.1,14.39 R32.2
POT_R1
  Top 0.406: JP4.3 77.57,55.22 TP27.TP 79.35,53.44 R1.2 84.07,55.94 R1.3
POT_R2
  Top 0.406: R2.1 84.17,59.17 R2.2 80.96,60.96 TP28.TP 77.37,60.3 JP4.1
POT_R4
  Top 0.406: R4.2 14.84,56.55 TP24.TP 17.13,59.12 IC2.3
POT_R5
  Top 0.406: IC3.3 19.77,44.56 17.68,42.47 | 17.68,42.47 17.47,42.27 | 17.47,42.27 17.12,42.27 TP25.TP | R5.2 8.44,38.72 11.99,42.27 17.47,42.27 | 17.47,42.27 17.68,42.47
POT_R6
  Top 0.406: IC4.3 17.74,22.21 16.86,21.34 16.2,21.34 TP26.TP 16.15,19.09 14.54,17.48 R6.2
REF_ADC  (via drill 0.6)
  Top 0.254: 87.78,24.59 C17.1
  Top 0.406: C18.1 C17.1 87.58,24.59 88.19,25.2 v88.19,27.03 | IC22.P$2 88.52,23.84 87.78,24.59 | IC24.P$2 48.29,24.25 46.33,26.21 C24.1 | C31.1 21.7,18.77 IC17.5 23.43,19.57 TP17.TP 27.63,23.77 39.82,23.77 | 39.82,23.77 42.26,23.77 43.69,25.2 45.31,25.2 46.16,26.05 C24.1 | C24.1 C23.1 | v40.43,24.99 40.43,24.38 39.82,23.77
  Route3 0.406: v88.19,27.03 81.48,27.03 79.04,24.59 46.94,24.59 46.33,25.2 40.64,25.2 v40.43,24.99
REFIN_DAC
  Top 0.406: C28.1 46.08,60.88 IC8.5 44.9,60.81 TP15.TP 44.9,55.68 43.48,54.25 43.48,50.6 44.29,49.78 44.29,48.36 43.89,47.95 42.6,47.95 IC23.10
RES_BIAS_EXT
  Top 0.406: JP4.2 73.4,57.76 71.32,55.68 70.78,55.14 IC1.P$6
RST
  Top 0.254: IC1.P$38 66.78,25.33 66.65,25.2 64.21,22.76 64.21,18.49 63.03,17.31 R37.2 R36.1
RST_CSA  (via drill 0.6)
  Top 0.254: IC1.P$12 65.98,42.01 v65.02,41.05
  Bottom 0.254: R28.1 R29.2 73.96,15.81 73.96,29.26 73.76,29.46 73.35,29.87 65.02,38.2 v65.02,41.05
RST_CSA_T
  Bottom 0.254: R28.2 76.64,12.64 74.98,10.97 74.88,10.87 J1.A35
RST_T
  Top 0.254: J1.A26 63.4,9.07 63.4,11.18 61.33,13.24 R36.2
SDI_DAC  (via drill 0.6)
  Top 0.254: IC23.7 41.56,49.47 41.04,49.99 40.84,50.19 40.84,53.03 v41.04,53.24
  Bottom 0.254: J1.A15 49.58,7.21 49.58,14.22 43.69,20.12 43.69,49.38 42.26,49.38 40.84,50.8 40.84,53.03 v41.04,53.24
SDI_REF  (via drill 0.6)
  Top 0.254: IC20.5 7.27,26.17 v6.91,25.81 | IC19.5 7.58,48.42 5.42,48.42 v4.67,49.17 | v5.48,64.01 9.32,64.01 IC18.5
  Bottom 0.254: 6.09,48.56 6.09,47.55 6.09,24.99 | 6.09,24.99 6.09,22.76 8.73,20.12 32.1,20.12 38.2,14.02 38.2,9.17 J1.A6 | v6.91,25.81 6.09,24.99 | v4.67,49.17 5.48,49.17 6.09,48.56 | 6.09,48.56 6.09,63.4 v5.48,64.01
SDO_ADC1
  Top 0.254: 85.04,13.51 85.34,13.82 88.08,16.56 88.52,17 IC22.P$8 | 85.04,13.51 84.97,13.51 R3.1 | 85.04,13.51 J1.A43
SDO_ADC2
  Top 0.254: IC24.P$8 48.36,19.55 48.36,18.49 50.75,16.1 50.75,15.1 R7.1 53.29,12.53 J1.A18
SGN
  Top 0.254: IC1.P$39 67.58,22.98 R34.1 R35.2
SGN_T
  Top 0.254: J1.A27 64.72,21.23 64.72,22.45 65.22,22.96 R34.2
V0NDAC
  Top 0.254: IC23.2 51.09,48.47 51.41,48.16 | 51.41,48.16 52.02,47.55 52.02,46.51 IC21.5 | C59.1 51.44,48.12 51.41,48.16
V0PDAC
  Top 0.254: IC21.2 49.98,46.46 49.98,47.35 49.36,47.97 IC23.1 45.75,46.91 C60.1
V1NDAC
  Top 0.254: 50.39,50.19 50.17,49.97 IC23.5 47.14,50.3 47.14,52.43 46.16,53.4 C53.1 | 50.39,50.19 50.59,50.39 | IC21.14 50.66,50.46 50.39,50.19
V1PDAC
  Top 0.254: IC21.11 52.63,51.86 52.63,50.19 51.91,49.47 IC23.4 45.83,49.47 45.51,49.78 45.51,51.17 C52.1
V_REF_PRECHAR  (via drill 0.6)
  Top 0.254: JP7.2 37.13,59.64 TP37.TP
  Top 0.406: IC1.P$7 69.98,44.62 v69.29,45.31
  Bottom 0.406: v69.29,45.31 69.29,55.47 65.22,59.54 33.83,59.54 33.73,59.64 JP7.2
V_REF_PRECHAR_BUFF
  Top 0.254: IC14.2 IC14.1 28.52,61.98 C34.1 30.46,60.05 31.09,60.05 31.49,59.64 31.49,58.62 33.02,57.1 JP7.1
VDD  (via drill 0.6)
  Top 0.254: IC23.8 41.21,48.97 40.43,49.75 C58.2
  Top 0.406: IC5.3 IC5.4 5.47,57.73 C3.1 | IC6.4 IC6.3 4.38,43.26 C1.1 | IC7.4 IC7.3 3.36,19.74 C2.1 | IC4.5 21.43,22.86 21.13,23.16 v21.13,24.79 | IC3.5 24.28,45.21 v24.38,45.31 | v20.93,62.99 20.11,62.18 IC2.5 | v39.01,48.16 39.01,48.32 39.01,49.14 C58.2 | v47.55,55.27 48.93,55.27 49.13,55.27 C39.2 49.39,55.52 IC21.16
  Top 0.508: C44.1 43.24,79.92 42.47,79.15 | 42.47,79.15 IC11.3 | TP5.TP 44.4,77.22 43.38,78.23 | 43.38,78.23 42.47,79.15 | v42.87,76.71 42.87,77.72 43.38,78.23 | v6.3,19.3 6.3,19.4 IC7.4 | v7.82,43.18 7.05,43.18 IC6.4 | IC5.3 2.73,58.44 v1.72,59.44 | IC18.2 10.66,67.77 v10.36,68.07 | v12.19,52.12 10.87,52.12 10.77,52.02 10.61,51.86 IC19.2 | IC20.2 10.86,29.97 v11.38,30.48
  pour Route3 (no thermals): 0.2,89.92 100.28,89.92 100.28,0 0.2,0
VDD2  (via drill 0.6)
  Top 0.406: IC13.4 IC13.3 87.3,45.86 C7.1 | IC10.4 42.43,33.41 C5.1 43.64,32.76 43.89,32.51 44.09,32.31 44.09,30.68 43.89,30.48 43.69,30.28 42.47,30.28 42.12,30.28 IC10.3
  Top 0.508: IC9.3 78.72,77.67 79.87,78.82 | 79.87,78.82 C46.1 | 44.09,32.31 44.9,32.31 v45.51,32.92 | C7.1 86.36,46.94 v85.95,47.35 | TP6.TP v80.97,77.22 79.87,78.31 79.87,78.82
  Route3 0.508: v80.97,77.22 80.97,72.54 | 80.97,72.54 80.97,52.32 v85.95,47.35 | v45.51,32.92 40.64,32.92 36.17,37.39 36.17,52.02 42.67,58.52 66.95,58.52 80.97,72.54
VDD3  (via drill 0.6)
  Top 0.254: C16.1 C15.1 84.8,21.91 IC22.P$4 | 44.01,22.47 C19.1 | IC16.3 33.26,17.27 | 33.26,17.27 IC16.4 | C25.1 33.91,17.92 33.26,17.27
  Top 0.406: IC17.4 26.98,18.77 C30.1 | IC8.4 42.94,61.98 | 42.94,61.98 IC8.3 | C4.1 42.49,61.53 42.94,61.98 | 44.01,22.47 IC24.P$4 | C19.1 C20.1 42.47,22.15 42.02,22.15
  Top 0.508: 60.82,79.08 59.42,77.67 IC15.3 60.86,76.1 v61.16,76.1 | 60.82,79.08 C51.1 | TP45.TP 62.68,77.22 60.82,79.08 | 42.49,61.53 39.86,61.53 v39.62,61.77 | IC17.4 IC17.3 25.33,14.9 25.33,14.56 v25.19,14.43 | IC16.3 34.19,15.04 v34.74,15.04 | IC12.8 19.5,30.67 21.33,32.51 v21.33,34.75 | C16.1 83.11,23.77 v83.31,23.98 | 42.02,22.15 v40.43,22.15 | IC14.8 28.04,56.71 v28.04,53.85
  Route3 0.508: 40.43,59.13 42.87,61.57 54.05,61.57 61.16,68.68 v61.16,76.1 | 18.29,35.97 18.29,47.55 22.25,51.51 25.6,51.51 25.7,51.51 | 18.29,35.97 18.29,24.79 23.16,19.91 27.23,19.91 | 40.43,59.13 32.81,51.51 25.7,51.51 | v39.62,61.77 39.62,59.94 40.43,59.13 | 27.23,19.91 25.8,18.49 25.8,15.04 v25.19,14.43 | v83.31,23.98 83.11,23.98 82.29,23.16 82.29,17.48 81.48,16.66 48.56,16.66 45.31,19.91 37.79,19.91 | 27.23,19.91 32.51,19.91 | 32.51,19.91 37.79,19.91 | v34.74,15.04 34.74,17.68 32.51,19.91 | v28.04,53.85 25.7,51.51 | v21.33,34.75 19.5,34.75 18.29,35.97 | 37.79,19.91 38.2,19.91 v40.43,22.15
VDD_REF_1
  Top 0.406: R4.1 9.64,60.59 TP41.TP 10.41,61.47 9.95,61.47 | 9.95,61.47 9.75,61.47 8.62,60.34 IC5.5 6.17,61.53 C26.1 | IC18.7 10.66,62.17 9.95,61.47
VDD_REF_2
  Top 0.406: TP42.TP 10.17,46.06 IC6.5 6.07,46.95 C27.1 | TP42.TP 10.36,47.35 10.56,47.55 10.61,47.59 IC19.7 | TP42.TP 9.54,45.05 9.54,42.87 5.08,38.41 3.38,38.41 R5.1
VDD_REF_3
  Top 0.406: TP43.TP 9.34,23.77 | C35.1 5.06,23.73 IC7.5 6.14,23.62 TP43.TP | TP43.TP 10.31,23.62 10.56,23.37 10.41,23.37 | 10.41,23.37 TP43.TP | IC20.7 10.86,24.33 TP43.TP | 10.41,23.37 10.41,21.05 10.41,19.43 R6.1
VDD_SUPPLY_1
  Top 0.508: IC11.1 36.27,77.78 36.27,79.25 35.59,79.92 C43.1 34.07,79.76 33.22,79.76 31.29,81.69 TP1.TP 22.09,81.69 JP5.1
VDD_SUPPLY_2
  Top 0.508: C45.1 71.83,78.74 | 71.83,78.74 71.83,76.2 70.3,74.68 49.48,74.68 33.73,74.68 31.09,74.68 TP3.TP | 27.63,77.72 TP3.TP | IC9.1 72.89,77.67 71.83,78.74 | JP8.1 26.01,77.83 26.41,77.42 TP3.TP
VDD_SUPPLY_3
  Top 0.508: IC15.1 52.52,79.81 C50.1 52.36,79.76 50.7,79.76 49.58,80.87 49.58,84.53 48.16,85.95 32.81,85.95 TP44.TP 26.31,83.92 25.7,83.92 JP20.1
VDD_SUPPLY_IN_1
  Top 0.508: JP17.1 8.33,80.26 12.19,84.12 TP2.TP | TP2.TP 13.61,84.33 14.02,84.33 15.95,84.33 18.34,84.33 JP20.2 | JP5.2 16.66,80.87 TP2.TP
VDD_SUPPLY_IN_2
  Top 0.508: JP17.2 12.34,77.72 13.61,78.99 TP4.TP 14.22,78.84 14.22,78.79 | JP8.2 15.19,77.83 14.3,78.72 14.22,78.79 | 14.02,78.99 14.22,78.79
VI+_FIL
  Top 0.254: JP11.2 56.08,39.62 58.72,36.98 60.53,36.98 IC1.P$22
VI+_FIL_DAC  (via drill 0.6)
  Top 0.254: IC21.4 51.29,44.7 | 51.29,44.7 51.29,44.59 | v50.8,44.3 50.89,44.3 51.29,44.7
  Bottom 0.254: v50.8,44.3 51.65,43.45 51.65,43.4 C54.1 52.98,41.13 JP11.1
VI-_FIL
  Top 0.254: JP12.2 57.91,36.98 58.32,36.58 58.64,36.25 IC1.P$23
VI-_FIL_DAC
  Top 0.254: JP12.1 52.22,36.98 51.41,37.8 50.63,38.57 C55.1 50.8,38.98 50.8,40.64 52.22,42.06 53.2,43.04 53.2,45.07 IC21.7
VICM  (via drill 0.6)
  Top 0.254: IC21.3 50.59,46.36 50.59,45.52 v48.97,43.89 49.78,43.08 51.81,43.08 52.56,43.83 IC21.6 | IC1.P$40 68.38,28.76 v68.48,28.85
  Top 0.406: JP15.2 30.43,34.59 31.09,33.93 34.13,33.93 35.35,35.15 35.35,40.44 36.17,41.25 46.33,41.25 v48.97,43.89
  Top 0.508: TP12.TP 34.95,40.84 35.35,40.44
  Route3 0.254: v48.97,43.89 49.98,42.88 55.88,42.88 68.48,30.28 v68.48,28.85
VICM_BUFF
  Top 0.254: IC12.2 IC12.1 21.74,35.87 24.18,35.87 | 24.18,35.87 27.57,35.87 JP15.1 | 24.18,35.87 25.14,34.91 C32.1
VICM_MUX
  Top 0.254: IC12.3 16.33,37.76
  Top 0.406: TP11.TP 23.57,43.48 IC3.4 | IC12.3 16.33,38.08 16.86,38.61 23.31,38.61 TP11.TP | 16.33,37.76 C47.1 | JP15.3 32.97,36.32 32.31,36.98 25.45,36.98 TP11.TP
VIN_CSA
  Top 0.254: IC1.P$15 63.58,47.89 JP10.2
  Bottom 0.254: JP1.3 63.65,47.85 JP10.2
VIN_CSA_1
  Top 0.254: IC21.9 55.88,51.92 56.49,51.31 C56.1 56.49,49.78 57.71,48.56 57.87,48.56 C36.1 58.32,47.75 60.6,47.75 | 60.6,47.75 JP9.1 60.6,47.75
VL_ADC  (via drill 0.6)
  Top 0.254: C14.1 C8.1 | IC22.P$7 87.37,19.06 | C22.1 C21.1 46.26,18.49 IC24.P$7 | IC16.5 30.91,18.12 C29.1 29.66,18.09 30.68,17.07 30.68,15.04 32.1,13.61 34.95,13.61 38,16.66 TP16.TP
  Top 0.406: 84.56,15.68 v84.12,15.24 83.22,14.34 R3.2 | C22.1 46.12,17.03 46.12,16.66 45.31,15.85 | TP16.TP 42.67,16.66 43.48,15.85 45.11,15.85 | R7.2 48.27,15.85 45.31,15.85 | 45.11,15.85 45.31,15.85 | v46.12,14.02 46.12,14.83 45.11,15.85 | 87.37,19.06 85.54,19.06 C8.1
  Top 0.508: 84.56,15.68 84.56,16.66 C14.1
  Route3 0.406: v84.12,15.24 46.94,15.24 46.12,14.43 v46.12,14.02
VO+_BP_FIL
  Top 0.254: JP3.3 54.15,33.02 56.49,35.36 56.58,35.45 IC1.P$24
VO+_CH
  Top 0.254: IC1.P$50 79.57,29.85 JP13.3
VO+_FIL
  Top 0.254: IC1.P$30 59.5,30.65 59.33,30.48 59.33,29.46 58.72,28.85 52.73,28.85 JP3.1
VO-_BP_FIL  (via drill 0.6)
  Top 0.254: IC1.P$25 58.22,34.65 v57.5,33.93
  Bottom 0.254: JP18.3 50.29,34.34 52.83,34.34 53.23,33.93 v57.5,33.93
VO-_CH
  Top 0.254: JP14.3 77.01,31.5 IC1.P$52
VO-_FIL  (via drill 0.6)
  Top 0.254: IC1.P$31 62.77,29.85 v62.79,29.87
  Bottom 0.254: JP18.1 49.68,27.94 51,26.62 59.53,26.62 | 59.53,26.62 59.94,27.03 | 59.94,27.03 v62.79,29.87 | 59.53,26.62 59.94,27.03
VOCM  (via drill 0.6)
  Top 0.254: IC1.P$36 65.18,28.81 v65.43,29.06 64.21,29.06 63.58,28.43 IC1.P$34 | TP14.TP 34.9,28.09 v34.95,28.04
  Route3 0.254: v65.43,29.06 62.18,29.06 59.53,26.42 33.93,26.42 33.42,26.92 | 33.42,26.92 30.48,29.87 JP16.2 | v34.95,28.04 34.54,28.04 33.42,26.92
VOCM_1
  Top 0.254: IC2.4 21.11,61.53 C49.1 25.28,60.13 25.6,60.45 25.6,61.96 IC14.3 25.57,63.07 26.41,63.91 28.04,65.53 29.21,65.53 TP30.TP 29.61,65.13 31.49,65.13 33.07,63.55 JP7.3
VOCM_BUFF
  Top 0.254: IC12.6 IC12.7 17.6,29.34 17.88,29.06 21.94,29.06 | 21.94,29.06 22.35,29.06 24.99,29.06 JP16.1 | 21.94,29.06 22.91,30.02 22.91,31.71 C33.1
VOCM_MUX
  Top 0.254: C48.1 14.55,30.67 IC12.5 15.03,30.65 15.03,29.46 17.32,27.18 TP13.TP 25.14,27.18 28.04,30.07 31.7,30.07 33.02,31.39 | IC4.4 22.04,22.15 22.55,22.15 23.06,22.66 24.18,23.77 24.18,27.18 24.2,27.19
  Top 0.406: JP16.3 33.02,31.39 | 23.11,27.23 24.2,27.19 TP13.TP
VOUT_CSA
  Top 0.254: TP9.TP 86.15,33.93 | JP19.3 89.51,28.96 88.8,29.67 88.8,32.72 87.58,33.93 86.56,33.93 TP9.TP | IC1.P$54 84.87,33.05 TP9.TP
VSS  (via drill 0.6)
  Top 0.508: IC14.4 24.3,64.01 | 24.3,64.01 24.3,65.56 JP23.1 | IC12.4 11.89,35.87 v11.78,35.76 | v22.55,64.62 23.7,64.62 24.3,64.01
  Route3 0.508: v22.55,64.62 22.55,55.68 22.55,55.47 11.99,44.91 11.99,44.7 11.99,44.3 11.99,35.97 v11.78,35.76
VSS_IN
  Top 0.508: JP23.2 16.86,68.58 14.98,70.46 TP39.TP 6.19,70.46 JP17.4

## Text on the board
tPlace: WAC | IC-UC | v9-2015
tNames: TP44 | TP2 | JP20 | TP1 | JP5 | C44 | C51 | C46 | TP4 | VDD1 | C43 | C50 | JP8 | TP3 | C45 | VDD2 | TP18 | JP2 | TP5 | TP45 | TP6 | GND | TP19 | JP6 | VSS | TP39 | JP17 | TP29 | JP23 | TP31 | IC18 | TP40 | TP30 | IC8 | C26 | TP28 | C28 | TP41 | IC2 | C4 | IC5 | IC14 | C3 | TP24 | TP37 | TP15 | C49 | C34 | C57 | JP7 | C39 | JP1 | C37 | C53 | JP4 | TP34 | TP27 | C59 | C36 | C58 | TP7 | C27 | IC19 | AVDD | TP46 | C60 | C56 | JP9 | JP10 | TP22 | C41 | AGND | C7 | IC6 | TP42 | IC3 | TP12 | TP38 | IC13 | JP22 | C1 | TP25 | JP21 | JP11 | TP11 | C47 | C55 | JP12 | C9 | C10 | JP15 | C6 | TP8 | IC1 | C33 | C32 | DVDD | IC12 | The Bean 2 | JP16 | JP14 | C48 | C5 | C40 | JP13 | IC20 | IC10 | C13 | C12 | C11 | C23 | TP33 | TP35 | TP47 | C24 | JP19 | TP13 | TP14 | TP23 | JP18 | JP3 | C18 | C35 | DGND | R38 | R34 | R18 | R22 | C17 | IC6 | C20 | C19 | IC24 | TP43 | C15 | IC4 | TP17 | TP32 | C16 | IC24 | TP26 | R39 | R35 | R19 | R23 | C25 | C42 | C2 | C21 | C31 | C22 | R33 | R37 | R15 | R17 | R21 | R25 | C8 | C30 | C14 | IC17 | C29 | IC16 | TP16 | R7 | R8 | R32 | TP36 | R36 | R14 | R16 | R20 | R25 | JP3 | R9
bNames: C54 | R30 | R26 | R40 | R31 | R27 | R41 | R29 | R43 | R42 | R28